# Altium PCB DA2_VERR2_PCB.PcbDoc (part 1 of 2)
Units mm, origin at the board's own origin, x right, y up, seen from the top; angles counter-clockwise.
Board outline 80.01 x 48.77 mm, 2 copper layers (Top Layer, Bottom Layer); 62 components, 71 nets, 290 pads, 92 vias.
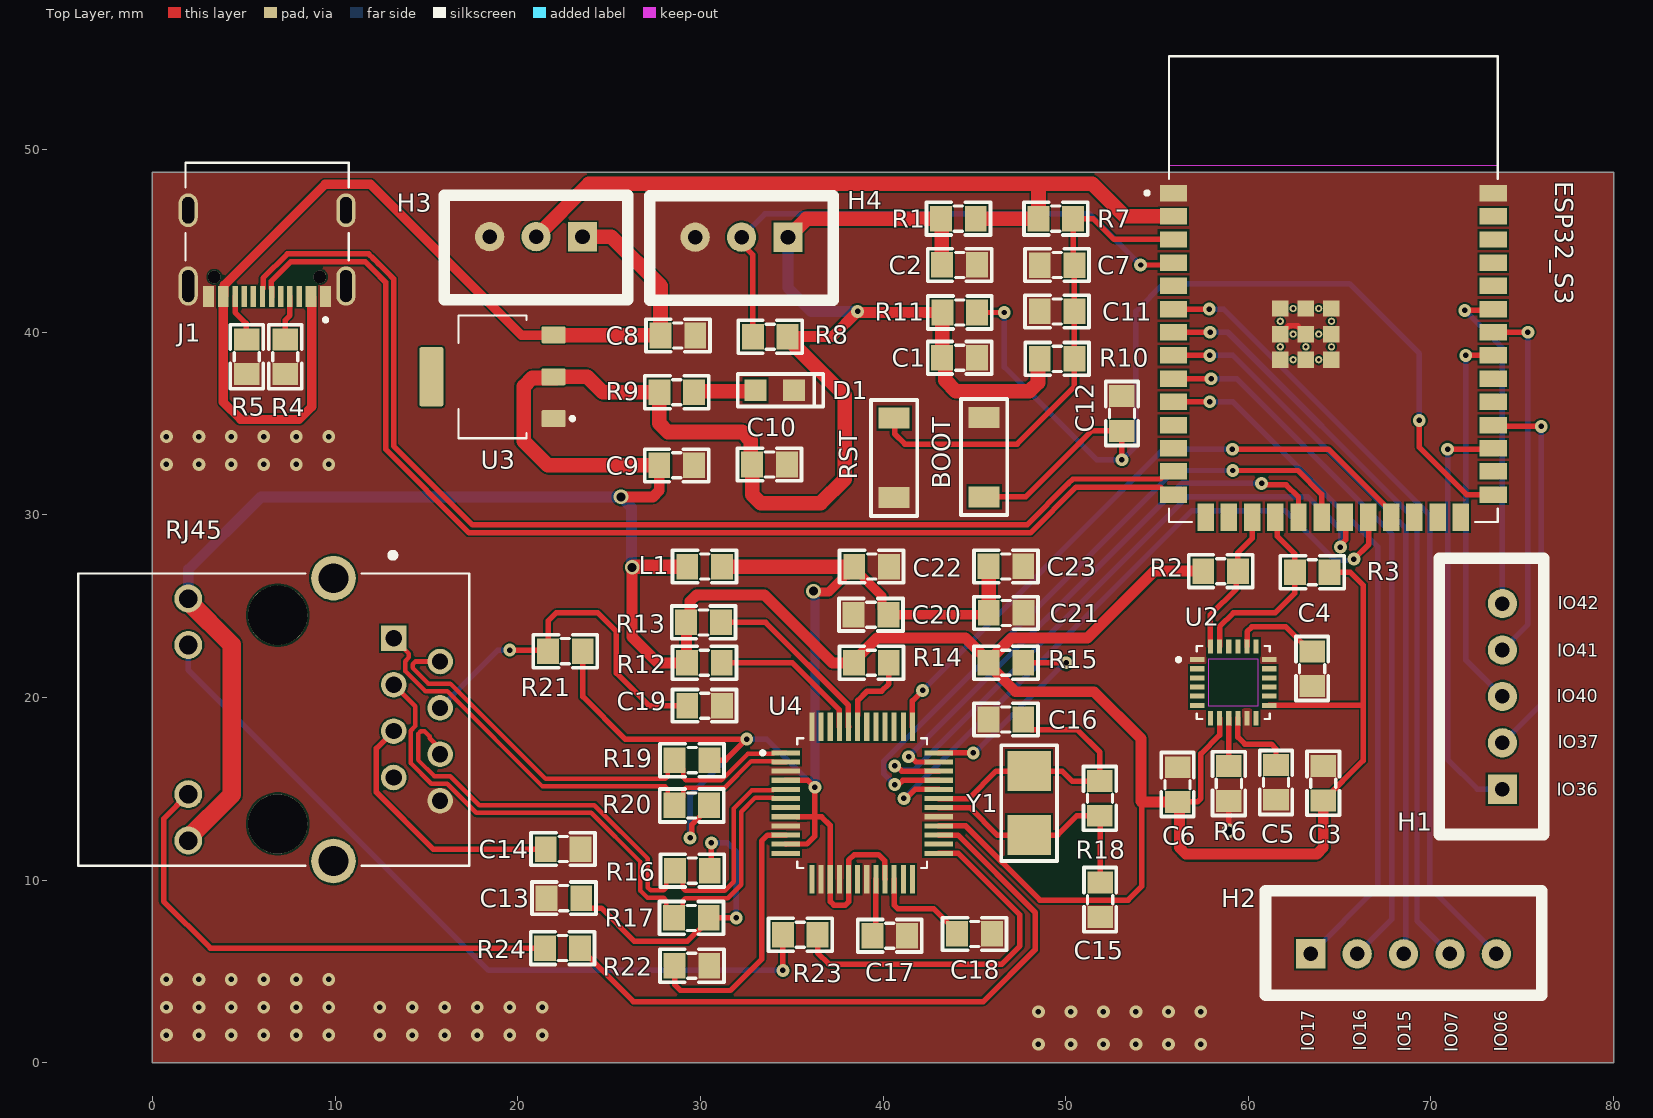
[diagram p0: Top Layer view]
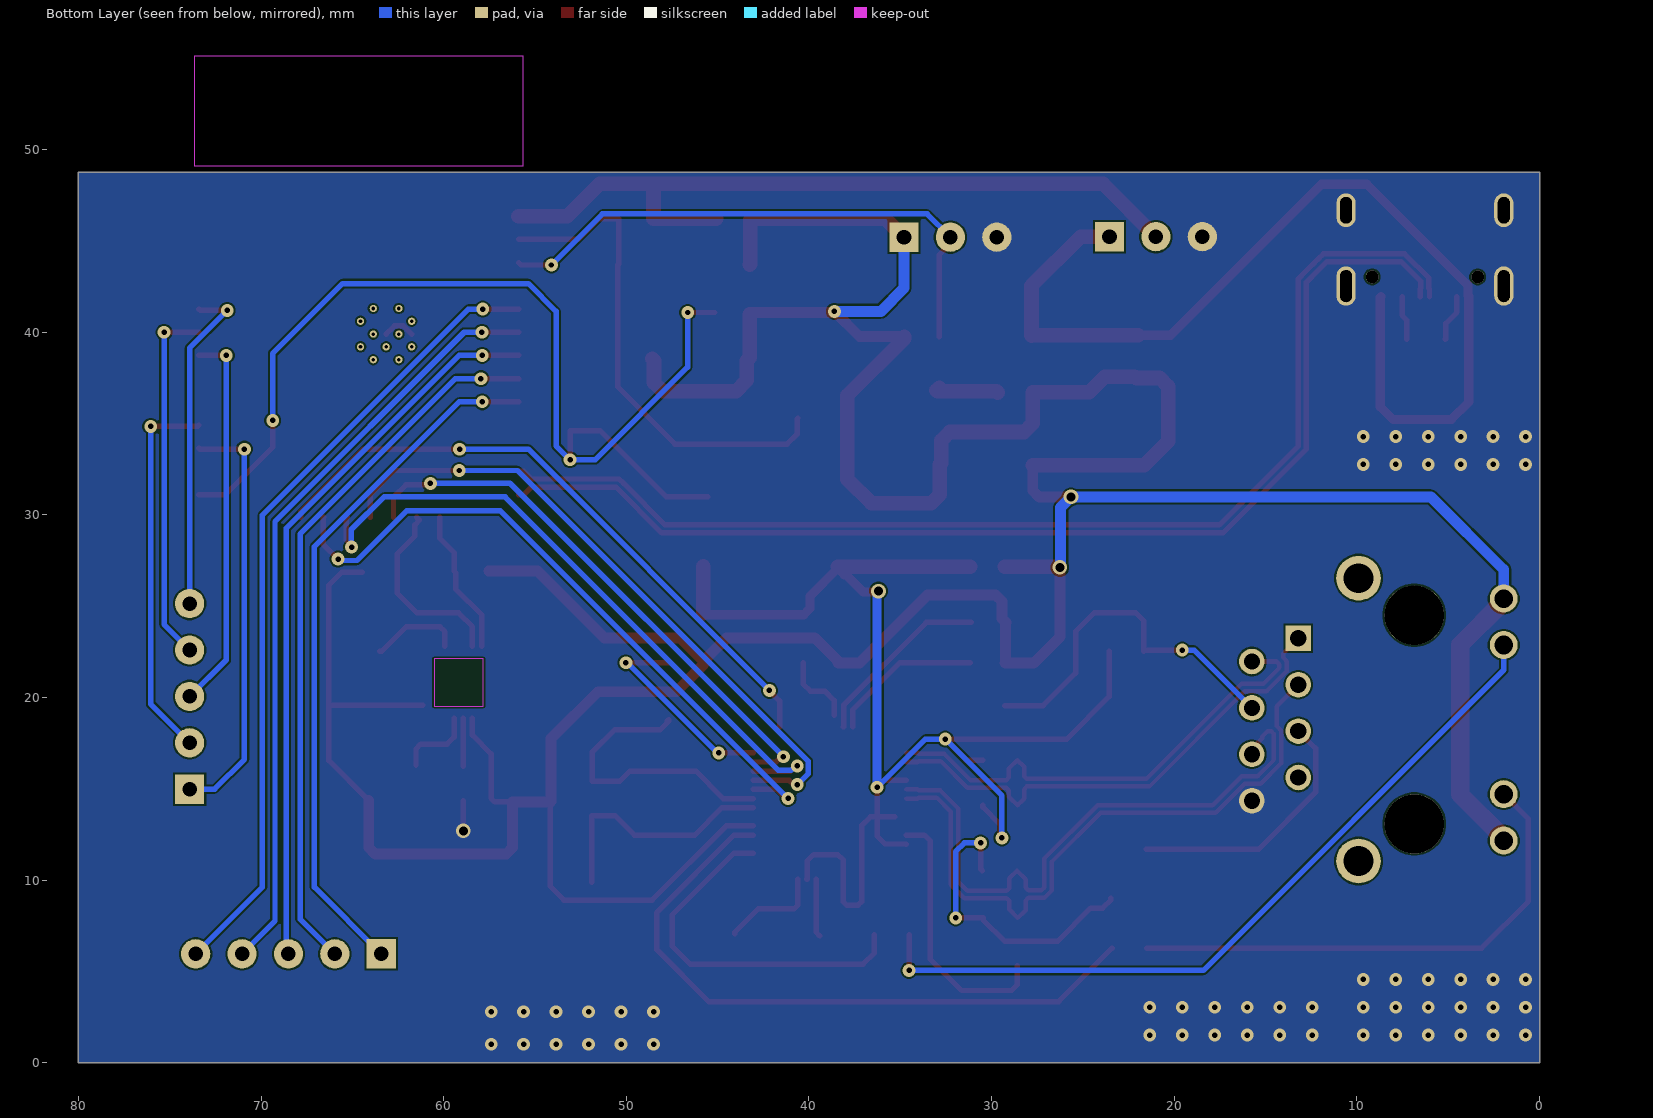
[diagram p1: Bottom Layer view, seen from below]
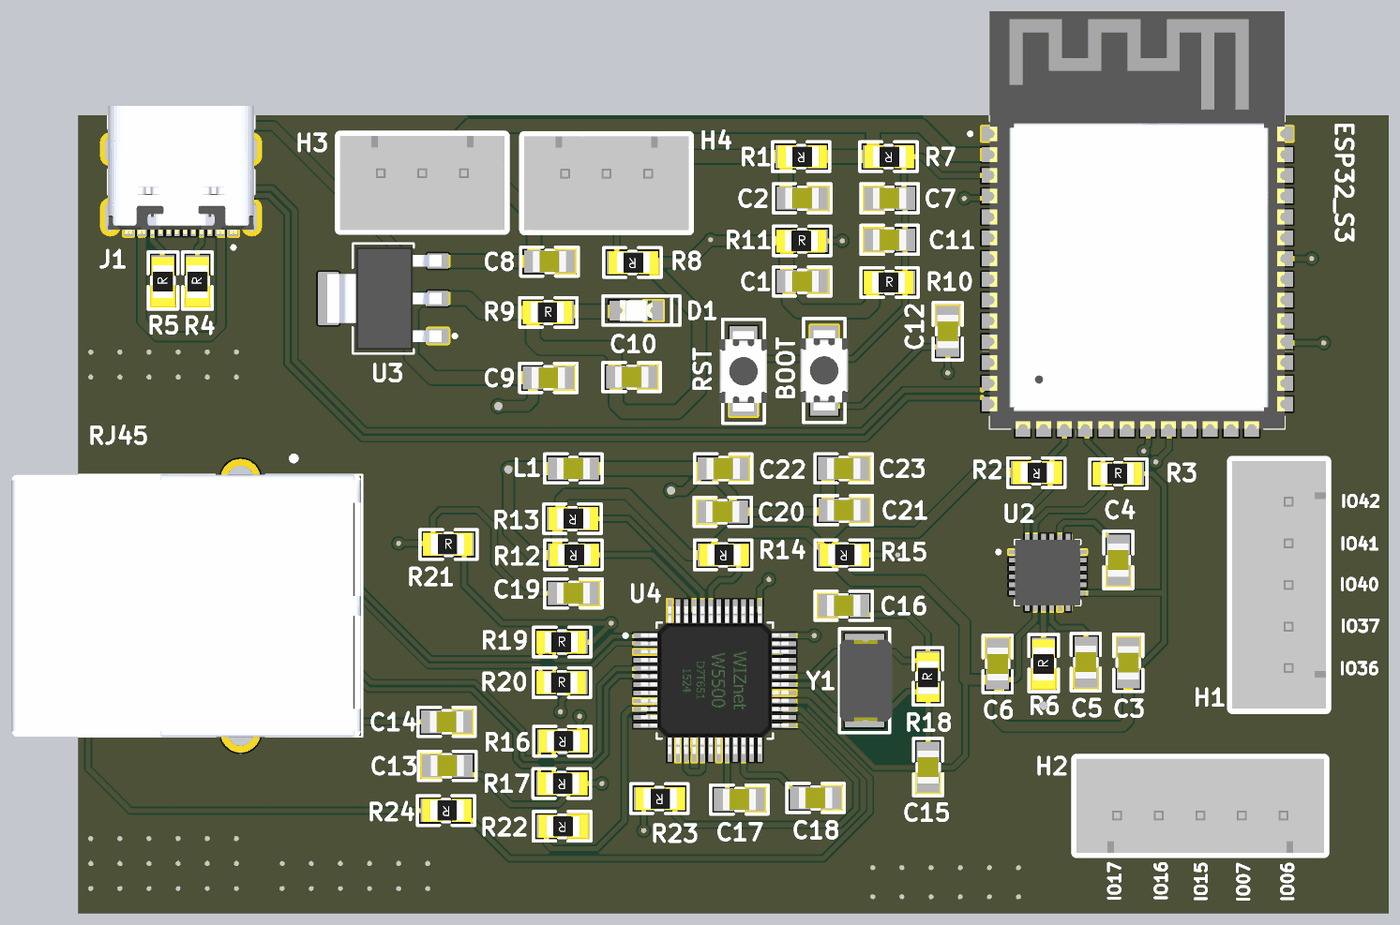
[diagram p2: 3D render of the assembled board from above, using the file's embedded part models]

## Layer stack, top to bottom
Top Solder: solder mask 0.0102, Solder Resist, Dk 3.5
Top Layer: signal copper 0.0356
Dielectric 1: dielectric 0.32, FR-4, Dk 4.8
Bottom Layer: signal copper 0.0356
Bottom Solder: solder mask 0.0102, Solder Resist, Dk 3.5

## Board outline
0,0 80.01,0 80.01,48.768 0,48.768

## Design rules (kind name [scope] priority, off if disabled: settings)
Clearance [All] p1: gap=0.1 ignorepadtopadclearanceinfootprint=FALSE
DiffPairsRouting DiffPairsRouting_diff90 [InDifferentialPair('DATA')] p1: maxlimit=0.14 minlimit=0.14 mostfreqgap=0.14 toplayer_minwidth=0.3 toplayer_maxwidth=0.3 toplayer_prefwidth=0.3 bottomlayer_minwidth=0.3 bottomlayer_maxwidth=0.3 bottomlayer_prefwidth=0.3 impedanceprofiledriven=TRUE impedanceprofileid={6B9BEBF5-C8D8-40E7-A6D3-6E69B729E11B} impedanceprofilevalue=90.000000 maxuncoupledlength=12.7
DiffPairsRouting DiffPairsRouting_diff100 [All] p2: maxlimit=0.161 minlimit=0.161 mostfreqgap=0.161 toplayer_minwidth=0.249 toplayer_maxwidth=0.249 toplayer_prefwidth=0.249 bottomlayer_minwidth=0.249 bottomlayer_maxwidth=0.249 bottomlayer_prefwidth=0.249 impedanceprofiledriven=TRUE impedanceprofileid={6716CD85-C355-4CCB-A095-ADE1CE298117} impedanceprofilevalue=100.000000 maxuncoupledlength=12.7
MatchedLengths DiffPair_100MatchedLengths [InDifferentialPairClass('diff100')] p1: tolerance=25.4 checknetsindiffpair=FALSE checkdiffpairvsdiffpair=TRUE checkxsignals=TRUE checkothers=TRUE
MinimumSolderMaskSliver [All] p1: minsoldermaskwidth=0
PlaneConnect [All] p1: planeconnectstyle=Direct reliefexpansion=0.508 reliefentries=4 reliefconductorwidth=0.254 reliefairgap=0.254
PolygonConnect [All] p1: connectstyle=Direct reliefconductorwidth=0.254 reliefentries=4 polygonreliefangle="90 Angle" airgapwidth=0.254
RoutingVias [All] p1: holewidth=0.3 width=0.7 viastyle="Through Hole" minholewidth=0.3 minwidth=0.7 maxholewidth=1 maxwidth=1
SilkToSilkClearance [All] p1: silktosilkclearance=0
SilkToSolderMaskClearance [IsPad] p1: minsilkscreentomaskgap=0 clearancetoexposedcopper=TRUE
SolderMaskExpansion [All] p1: expansion=0.102 istentingtop=FALSE
SupplyNets "Schematic Supply Nets_4" [InNet('VCC_5V')] p1: voltage=0.000
SupplyNets "Schematic Supply Nets_3" [InNet('GND')] p2: voltage=0.000
SupplyNets "Schematic Supply Nets_2" [InNet('ESP_3V3')] p3: voltage=0.000
SupplyNets "Schematic Supply Nets_1" [InNet('VCC_3V3')] p4: voltage=0.000
SupplyNets "Schematic Supply Nets" [InNet('VCC_PHYA(3V3)')] p5: voltage=0.000
Width [All] p1: maxlimit=5 minlimit=0.15 preferedwidth=0.3
25 further rules are at their usual default settings.

## Classes and differential pairs
differential pair class diff100: ETH_RX ETH_TX
differential pair class diff90: DATA
component class DA2_SCH_PAGE2: C13 C14 C15 C16 C17 C18 C19 C20 C21 C22 C23 L1 R12 R13 R14 R15 R16 R17 R18 R20 R21 R22 R23 R24 RJ45 U4 Y1
component class DA2_SCH_PAGE1: BOOT C1 C2 C3 C4 C5 C6 C7 C8 C9 C10 C11 C12 D1 ESP32_S3 H1 H2 H3 H4 J1 R1 R2 R3 R4 R5 R6 R7 R8 R9 R10 R11 RST U2 U3
differential pair ETH_TX: +ETH_TX_P -ETH_TX_N
differential pair ETH_RX: +ETH_RX_P -ETH_RX_N
differential pair DATA: +DATA_P -DATA_N

## Components (designator, comment, footprint, x,y, rotation, side; value= is the part's Value field where it differs from the comment)
BOOT "TACTILE SWITCH" "SWITCH SMD" 45.542,33.172 r90 top (schematic designator SW2)
C1 "0.1uF" "Tu 0805" 44.196,38.608 r180 top value=100nF
C2 "10uF" "Tu 0805" 44.196,43.688 r180 top value=10µF
C3 "10nF" "tu 0805" 64.11,15.316 r270 top
C4 "2.2nF" "tu 0805" 63.5,21.59 r270 top
C5 "0.1uF" "Tu 0805" 61.515,15.352 r90 top value=100nF
C6 "0.1uF" "Tu 0805" 56.134,15.24 r270 top value=100nF
C7 "1uF" "Tu 0805" 49.53,43.688 r0 top value=1µF
C8 "10uF" "Tu 0805" 28.772,39.824 r180 top value=10µF
C9 "10uF" "Tu 0805" 28.702,32.715 r180 top value=10µF
C10 "100nF" "tu 0805" 33.782,32.766 r0 top
C11 "100nF" "tu 0805" 49.53,41.148 r0 top
C12 "100nF" "tu 0805" 53.086,35.56 r270 top
C13 "100nF" "tu 0805" 22.53,9.017 r180 top
C14 "10nF" "tu 0805" 22.479,11.709 r0 top
C15 "20pF" "tu 0805" 51.892,8.941 r270 top
C16 "20pF" "tu 0805" 46.736,18.796 r180 top
C17 "4.7uF" "Tu 0805" 40.361,6.96 r0 top
C18 "10nF" "tu 0805" 45.009,7.061 r0 top
C19 "22nF" "tu 0805" 30.226,19.558 r0 top
C20 "100nF" "tu 0805" 39.345,24.536 r180 top
C21 "100nF" "tu 0805" 46.736,24.638 r0 top
C22 "100nF" "tu 0805" 39.37,27.178 r0 top
C23 "10uF" "Tu 0805" 46.736,27.178 r180 top value=10µF
D1 "LED_RED" "LED 0805" 34.07,36.83 r180 top
ESP32_S3 "ESP32-S3-WROOM-1-N8R2" XCVR_ESP32-S3-WROOM-1-N8R2 64.656,42.365 r0 top (schematic designator U1)
H1 "Header 5P 2.54" XH2.54M-5 73.914,14.986 r90 top
H2 "Header 5P 2.54" XH2.54M-5 63.424,5.969 r0 top
H3 "Header 3P 2.54" XH2.54M-3 23.546,45.237 r180 top
H4 "Header 3P 2.54" XH2.54M-3 34.798,45.212 r180 top
J1 "KH-TYPE-C-16P" KINGHELM_KH-TYPE-C-16P 6.274,46.685 r180 top locked
L1 "1uH" "Tu 0805" 30.226,27.178 r0 top
R1 "0 Ohm" "Tro SMD 0805" 44.134,46.167 r180 top value=0Ω
R2 "4.7k" "tro smd 0805" 58.49,26.863 r180 top
R3 "4.7k" "tro smd 0805" 63.5,26.924 r0 top
R4 "5.1K" "tro smd 0805" 7.214,38.659 r90 top
R5 "5.1K" "tro smd 0805" 5.105,38.659 r90 top
R6 "4.7k" "tro smd 0805" 58.877,15.291 r90 top
R7 "10k" "Tro SMD 0805" 49.468,46.167 r180 top value=10kΩ
R8 "4.7k" "tro smd 0805" 33.833,39.7 r180 top
R9 "1k" "Tro SMD 0805" 28.702,36.779 r0 top value=1kΩ
R10 "10k" "Tro SMD 0805" 49.53,38.608 r0 top value=10kΩ
R11 "10k" "Tro SMD 0805" 44.196,41.148 r0 top value=10kΩ
R12 "10k" "Tro SMD 0805" 30.226,21.844 r180 top value=10kΩ
R13 "10k" "Tro SMD 0805" 30.175,24.054 r180 top value=10kΩ
R14 "10k" "Tro SMD 0805" 39.37,21.844 r180 top value=10kΩ
R15 "10k" "Tro SMD 0805" 46.736,21.844 r180 top value=10kΩ
R16 "51" "tro smd 0805" 29.566,10.465 r180 top
R17 "51" "tro smd 0805" 29.515,7.874 r180 top
R18 "1M" "tro smd 0805" 51.816,14.478 r90 top
R19 "51" "tro smd 0805" 29.54,16.637 r0 top
R20 "51" "tro smd 0805" 29.526,14.158 r0 top
R21 "10" "tro smd 0805" 22.606,22.606 r0 top
R22 "12.4k" "tro smd 0805" 29.54,5.258 r180 top
R23 "1k" "Tro SMD 0805" 35.478,6.95 r180 top value=1kΩ
R24 "1k" "Tro SMD 0805" 22.454,6.223 r180 top value=1kΩ
RJ45 "HR911105A" HANRUN_HR911105A 6.858,18.796 r90 top (schematic designator J2)
RST "TACTILE SWITCH" "SWITCH SMD" 40.615,33.122 r270 top (schematic designator SW1)
U2 "MPU-6050" QFN50P400X400X95-24N 59.182,20.828 r0 top
U3 "AMS1117-3.3" SOT229P700X180-4N 18.618,37.567 r90 top
U4 "W5500" QFP50P900X900X160-48N 38.862,14.224 r0 top
Y1 "25Mhz" "XTAL 25.000MHz" 48.006,14.224 r90 top value=4Mhz

## Footprints (in the part's own frame and the unit in brackets; to place one, negate y for a bottom-side part, rotate by r counter-clockwise, add the part's x,y. Pads: shape width x height; smd on the part's side, far side on the other; paste and mask are expansions set on the pad)
HANRUN_HR911105A [mm]
  rect 1.398x1.398 / inner round 1.398 / far side rect 1.398x1.398 hole 0.89: 1(4.45,-6.35)
  round 1.398 hole 0.89: 2(3.18,-8.89) 3(1.91,-6.35) 4(0.64,-8.89) 5(-0.63,-6.35) 6(-1.9,-8.89) 7(-3.17,-6.35) 8(-4.44,-8.89)
  round 1.53 hole 1.02: 9(6.625,4.9) 10(4.085,4.9) 11(-4.085,4.9) 12(-6.625,4.9)
  round 2.445 hole 1.63: 15(7.745,-3.05) 16(-7.745,-3.05)
  round 3.25 hole 3.25 unplated: ""(-5.715,0) ""(5.715,0)
  silkscreen extent -8,-10.48 9.15,10.92, body extent -8.02,-10.38 8.02,10.92, height 13.5
KINGHELM_KH-TYPE-C-16P [mm]
  rect 0.6x1.15 smd: A1_B12(-3.2,4.725) A4_B9(-2.4,4.725) A9_B4(2.4,4.725) A12_B1(3.2,4.725)
  rect 0.3x1.15 smd: A5(-1.25,4.725) A6(-0.25,4.725) A7(0.25,4.725) A8(1.25,4.725) B5(1.75,4.725) B6(0.75,4.725) B7(-0.75,4.725) B8(-1.75,4.725)
  oval 1.05x1.85 hole 0.65 slot 1.45 at 90 deg: SH1(-4.32,0) SH2(4.32,0)
  oval 1.05x2.15 hole 0.65 slot 1.75 at 90 deg: SH3(-4.32,4.15) SH4(4.32,4.15)
  round 0.7 hole 0.7 unplated: ""(-2.89,3.65) ""(2.89,3.65)
  silkscreen extent -4.47,-2.6 4.47,6.1, body extent -4.47,-2.64 4.47,5.18, height 3.41
"LED 0805" [mm]
  rect 1.2x1.2 smd: 1(-1.05,0) 2(1.05,0)
  silkscreen extent -2.67,-0.89 2.03,0.89, body extent -1,-0.63 1,0.63, height 0.8
QFN50P400X400X95-24N [mm]
  rect 0.79x0.28 smd: 1(-1.97,1.25) 2(-1.97,0.75) 3(-1.97,0.25) 4(-1.97,-0.25) 5(-1.97,-0.75) 6(-1.97,-1.25) 13(1.97,-1.25) 14(1.97,-0.75) 15(1.97,-0.25) 16(1.97,0.25) 17(1.97,0.75) 18(1.97,1.25)
  rect 0.28x0.79 smd: 7(-1.25,-1.97) 8(-0.75,-1.97) 9(-0.25,-1.97) 10(0.25,-1.97) 11(0.75,-1.97) 12(1.25,-1.97) 19(1.25,1.97) 20(0.75,1.97) 21(0.25,1.97) 22(-0.25,1.97) 23(-0.75,1.97) 24(-1.25,1.97)
  Keep-Out Layer region: 1.35,-1.3 -1.35,-1.3 -1.35,1.3 1.35,1.3
  silkscreen extent -3.1,-2 2,2, body extent -2,-2 2,2, height 0.93
QFP50P900X900X160-48N [mm]
  rect 1.56x0.28 smd: 1(-4.18,2.75) 2(-4.18,2.25) 3(-4.18,1.75) 4(-4.18,1.25) 5(-4.18,0.75) 6(-4.18,0.25) 7(-4.18,-0.25) 8(-4.18,-0.75) 9(-4.18,-1.25) 10(-4.18,-1.75) 11(-4.18,-2.25) 12(-4.18,-2.75) 25(4.18,-2.75) 26(4.18,-2.25) 27(4.18,-1.75) 28(4.18,-1.25) 29(4.18,-0.75) 30(4.18,-0.25) 31(4.18,0.25) 32(4.18,0.75) 33(4.18,1.25) 34(4.18,1.75) 35(4.18,2.25) 36(4.18,2.75)
  rect 0.28x1.56 smd: 13(-2.75,-4.18) 14(-2.25,-4.18) 15(-1.75,-4.18) 16(-1.25,-4.18) 17(-0.75,-4.18) 18(-0.25,-4.18) 19(0.25,-4.18) 20(0.75,-4.18) 21(1.25,-4.18) 22(1.75,-4.18) 23(2.25,-4.18) 24(2.75,-4.18) 37(2.75,4.18) 38(2.25,4.18) 39(1.75,4.18) 40(1.25,4.18) 41(0.75,4.18) 42(0.25,4.18) 43(-0.25,4.18) 44(-0.75,4.18) 45(-1.25,4.18) 46(-1.75,4.18) 47(-2.25,4.18) 48(-2.75,4.18)
  silkscreen extent -5.55,-3.55 3.55,3.55, body extent -4.5,-4.47 4.5,4.53, height 1.6
SOT229P700X180-4N [mm]
  rrect15% 0.93x1.31 smd: 1(-2.29,-3.345) 2(0,-3.345) 3(2.29,-3.345)
  rrect15% 3.24x1.31 smd: 4(0,3.345)
  silkscreen extent -3.36,-4.47 3.36,1.86, body extent -3.15,-3.57 3.15,3.43, height 1.8
"SWITCH SMD" [mm]
  rect 1.15x1.7 smd: 1(-2.175,0) 2(2.175,0)
  silkscreen extent -3.17,-1.27 3.17,1.27, body extent -2.45,-1.45 2.45,1.45, height 2
"Tro SMD 0805" [mm]
  rect 1.2x1.4 smd: 1(-0.946,-0.061) 2(0.954,-0.061)
  silkscreen extent -1.75,-0.97 1.75,0.84, body extent -1.56,-0.76 1.44,0.64, height 0.53
"tro smd 0805" [mm]
  rect 1.2x1.4 smd: 1(-0.946,-0.061) 2(0.954,-0.061)
  silkscreen extent -1.75,-0.97 1.75,0.84, body extent -1.56,-0.76 1.44,0.64, height 0.53
"Tu 0805" [mm] "Compoment SMD 80x50mil"
  rect 1.2x1.4 smd: 1(-0.946,-0.003) 2(0.954,-0.003)
  silkscreen extent -1.75,-0.89 1.75,0.89, body extent -1.01,-0.64 1.01,0.63, height 0.61
"tu 0805" [mm] "Compoment SMD 80x50mil"
  rect 1.2x1.4 smd: 1(-0.946,-0.003) 2(0.954,-0.003)
  silkscreen extent -1.75,-0.89 1.75,0.89, body extent -1.01,-0.64 1.01,0.63, height 0.61
XCVR_ESP32-S3-WROOM-1-N8R2 [mm]
  rect 1.5x0.9 smd: 1(-8.75,5.26) 2(-8.75,3.99) 3(-8.75,2.72) 4(-8.75,1.45) 5(-8.75,0.18) 6(-8.75,-1.09) 7(-8.75,-2.36) 8(-8.75,-3.63) 9(-8.75,-4.9) 10(-8.75,-6.17) 11(-8.75,-7.44) 12(-8.75,-8.71) 13(-8.75,-9.98) 14(-8.75,-11.25) 27(8.75,-11.25) 28(8.75,-9.98) 29(8.75,-8.71) 30(8.75,-7.44) 31(8.75,-6.17) 32(8.75,-4.9) 33(8.75,-3.63) 34(8.75,-2.36) 35(8.75,-1.09) 36(8.75,0.18) 37(8.75,1.45) 38(8.75,2.72) 39(8.75,3.99) 40(8.75,5.26)
  rect 0.9x1.5 smd: 15(-6.985,-12.5) 16(-5.715,-12.5) 17(-4.445,-12.5) 18(-3.175,-12.5) 19(-1.905,-12.5) 20(-0.635,-12.5) 21(0.635,-12.5) 22(1.905,-12.5) 23(3.175,-12.5) 24(4.445,-12.5) 25(5.715,-12.5) 26(6.985,-12.5)
  rect 0.9x0.9 smd: 41_1(-1.5,-2.46) 41_2(-2.9,-2.46) 41_3(-0.1,-2.46) 41_4(-2.9,-3.86) 41_5(-1.5,-3.86) 41_6(-0.1,-3.86) 41_7(-2.9,-1.06) 41_8(-1.5,-1.06) 41_9(-0.1,-1.06)
  round 0.4 hole 0.2 mask+0: 41_11(-2.9,-1.76) 41_12(-0.1,-1.76) 41_13(-2.9,-3.16) 41_14(-1.5,-3.16) 41_15(-0.1,-3.16) 41_16(-2.2,-1.06) 41_17(-0.8,-1.06) 41_18(-2.2,-2.46) 41_19(-0.8,-2.46) 41_20(-2.2,-3.86) 41_21(-0.8,-3.86)
  Keep-Out Layer region: 9,6.75 -9,6.75 -9,12.75 9,12.75
  Keep-Out Layer region: 9,6.75 -9,6.75 -9,12.75 9,12.75
  silkscreen extent -10.3,-12.75 9,12.75, body extent -9,-12.75 9,12.75, height 3.25
XH2.54M-3 [mm]
  rect 1.6x1.6 hole 0.8: 1(0,0)
  round 1.6 hole 0.8: 2(2.54,0) 3(5.08,0)
  silkscreen extent -2.48,-2.26 7.56,3.46, body extent -2.48,-2.26 7.56,3.48, height 6.91
XH2.54M-5 [mm]
  rect 1.6x1.6 hole 0.8: 1(0,0)
  round 1.6 hole 0.8: 2(2.54,0) 3(5.08,0) 4(7.62,0) 5(10.16,0)
  silkscreen extent -2.48,-2.26 12.64,3.46, body extent -2.48,-2.26 12.64,3.48, height 6.91
"XTAL 25.000MHz" [mm]
  rect 2.2x2.4 smd: 1(-1.75,0) 2(1.75,0)
  silkscreen extent -3.17,-1.52 3.17,1.52, body extent -2.5,-1.68 2.5,1.52, height 1.35

## Part data
BOOT RST: library part SW1_RS-282G05A3-SMRT-SMD, "Tactile Switch SPST-NO Top Actuated Surface Mount", Alternate Part Number-1=NA, Case/Package=SMD, Manufacturer="ITT C&K", Manufacturer Part Number=RS-282G05A3-SMRT, Supplier Part Number-1=RS-282G05A3-SMRT, Supplier-1="SP ROAD"
C1 C5 C6: library part "Tu 0.1uF", "Dán 0805", Dielectric Material=Ceramic, LCSC Part Number=C7229230, Manufacturer="Samsung Electro-Mechanics", Manufacturer Part Number=CL05B104KB5NNWC, Max Operating Temperature=125°C, Min Operating Temperature=-55°C, Supplier Part Number=1276-CL05B104KB5NNWCCT-ND, Voltage Rating (DC)=50V, Category="Ceramic Capacitors", China RoHS=Compliant, ComponentLink1Description=https://datasheet.octopart.com:443/CL05B104KB5NNWC-Samsung-Electro-Mechanics-datasheet-182018729.pdf?src-supplier=IHS, ComponentLink1URL=https://datasheet.octopart.com:443/CL05B104KB5NNWC-Samsung-Electro-Mechanics-datasheet-182018729.pdf?src-supplier=IHS, Lifecycle Status=Production, Mounting Technology="Surface Mount", Number of Terminals=2, Pricing="1=0.1, 10=0.054, 50=0.037, 100=0.0319, 500=0.02338, 1000=0.02075, 2500=0.018, 5000=0.01634 (USD)", REACH SVHC=Yes, RoHS=Compliant, Schedule B="8532240020, 8532240020|8532240020|8532240020|8532240020|8532240020", Stock=89504, Supplier=DigiKey
C2 C8 C9 C23: library part "Tu 10uF", "Dán 0805", Case Code (Imperial)=0402, Case Code (Metric)=1005, Dielectric=X5R, Dielectric Material=Ceramic, LCSC Part Number=C315248, Manufacturer="Samsung Electro-Mechanics", Manufacturer Part Number=CL05A106MP5NUNC, Max Operating Temperature=85°C, Min Operating Temperature=-55°C, Supplier Part Number=1276-1450-1-ND, Tolerance=20%, Voltage Rating=10V, Case/Package=0402, Category="Ceramic Capacitors", China RoHS=Compliant, ComponentLink1Description=https://datasheet.octopart.com:443/CL05A106MP5NUNC-Samsung-Electro-Mechanics-datasheet-182018593.pdf?src-supplier=IHS, ComponentLink1URL=https://datasheet.octopart.com:443/CL05A106MP5NUNC-Samsung-Electro-Mechanics-datasheet-182018593.pdf?src-supplier=IHS, ComponentLink2Description=https://datasheet.octopart.com:443/CL05A106MP5NUNC-Samsung-Electro-Mechanics-datasheet-136031723.pdf?src-supplier=Upverter, ComponentLink2URL=https://datasheet.octopart.com:443/CL05A106MP5NUNC-Samsung-Electro-Mechanics-datasheet-136031723.pdf?src-supplier=Upverter, ComponentLink3Description=https://datasheet.octopart.com:443/CL05A106MP5NUNC-Samsung-Electro-Mechanics-datasheet-110226206.pdf?src-supplier=Future+Electronics, ComponentLink3URL=https://datasheet.octopart.com:443/CL05A106MP5NUNC-Samsung-Electro-Mechanics-datasheet-110226206.pdf?src-supplier=Future+Electronics, ComponentLink4Description=https://datasheet.octopart.com:443/CL05A106MP5NUNC-Samsung-Electro-Mechanics-datasheet-87580039.pdf?src-supplier=Future+Electronics, ComponentLink4URL=https://datasheet.octopart.com:443/CL05A106MP5NUNC-Samsung-Electro-Mechanics-datasheet-87580039.pdf?src-supplier=Future+Electronics, ComponentLink5Description=https://datasheet.octopart.com:443/CL05A106MP5NUNC-Samsung-Electro-Mechanics-datasheet-81461595.pdf?src-supplier=Future+Electronics, ComponentLink5URL=https://datasheet.octopart.com:443/CL05A106MP5NUNC-Samsung-Electro-Mechanics-datasheet-81461595.pdf?src-supplier=Future+Electronics, ComponentLink6Description=https://datasheet.octopart.com:443/CL05A106MP5NUNC-Samsung-datasheet-42280527.pdf?src-supplier=Future+Electronics, ComponentLink6URL=https://datasheet.octopart.com:443/CL05A106MP5NUNC-Samsung-datasheet-42280527.pdf?src-supplier=Future+Electronics, ComponentLink7Description=https://datasheet.octopart.com:443/CL05A106MP5NUNC-Samsung-datasheet-34153002.pdf?src-supplier=Future+Electronics, ComponentLink7URL=https://datasheet.octopart.com:443/CL05A106MP5NUNC-Samsung-datasheet-34153002.pdf?src-supplier=Future+Electronics, ComponentLink8Description=https://datasheet.octopart.com:443/CL05A106MP5NUNC-Samsung-datasheet-25077983.pdf?src-supplier=Future+Electronics, ComponentLink8URL=https://datasheet.octopart.com:443/CL05A106MP5NUNC-Samsung-datasheet-25077983.pdf?src-supplier=Future+Electronics, ComponentLink9Description=https://datasheet.octopart.com:443/CL05A106MP5NUNC-Samsung-Electro-Mechanics-datasheet-149136670.pdf?src-supplier=Future+Electronics, ComponentLink9URL=https://datasheet.octopart.com:443/CL05A106MP5NUNC-Samsung-Electro-Mechanics-datasheet-149136670.pdf?src-supplier=Future+Electronics, ComponentLink10Description=https://datasheet.octopart.com:443/CL05A106MP5NUNC-Samsung-datasheet-8326407.pdf?src-supplier=TME, ComponentLink10URL=https://datasheet.octopart.com:443/CL05A106MP5NUNC-Samsung-datasheet-8326407.pdf?src-supplier=TME, Contact Plating=Tin, Depth=500µm, Height=700µm, Lead Free="Lead Free", Length=1mm, Lifecycle Status=NRND, Material=Ceramic, Mounting Technology="Surface Mount", Number of Terminals=2, Packaging="Tape and Reel", Pricing="1=0.08, 10=0.038, 50=0.034, 100=0.0296, 500=0.0272, 1000=0.02, 2500=0.01844 (USD)", Radiation Hardening=No, REACH SVHC=Yes, RoHS=Compliant, Schedule B="8532240020, 8532240020|8532240020|8532240020|8532240020|8532240020|8532240020|8532240020|8532240020|8532240020|8532240020|8532240020|8532240020|8532240020|8532240020|8532240020|8532240020|8532240020|8532240020|8532240020|8532240020|8532240020|8532240020|8532240020|85", Stock=2239957, Supplier=DigiKey, Termination=Wraparound, Thickness=711.2µm, Voltage Rating (DC)=10V, Width=500µm
C3 C14 C18: library part "Tu 10nF", "Dán 0805", Chung_Loai=Dán, Don_Vi=Con, Ma_Hang=MH007857, So_Chan=2, Ten_Linh_Kien="Tụ 0805 22nF 50V 20%"
C4: library part "Tu 2.2nF", "Dán 0805", Chung_Loai=Dán, Don_Vi=Con, Ma_Hang=MH007857, So_Chan=2, Ten_Linh_Kien="Tụ 0805 22nF 50V 20%"
C7: library part "Tu 1uF", "Dán 0805", Case Code (Imperial)=0402, Case Code (Metric)=1005, Dielectric=X5R, Dielectric Material=Ceramic, LCSC Part Number=C361059, Manufacturer=Murata, Manufacturer Lifecycle Status="IN PRODUCTION", Manufacturer Part Number=GRM155R6YA105KE11D, Max Operating Temperature=85°C, Min Operating Temperature=-55°C, Supplier Part Number=490-10019-1-ND, Tolerance=10%, Voltage Rating=35V, Case/Package=0402, Category="Ceramic Capacitors", ComponentLink1Description=https://datasheet.octopart.com:443/GRM155R6YA105KE11D-Murata-datasheet-149523044.pdf?src-supplier=Newark, ComponentLink1URL=https://datasheet.octopart.com:443/GRM155R6YA105KE11D-Murata-datasheet-149523044.pdf?src-supplier=Newark, ComponentLink2Description=https://datasheet.octopart.com:443/GRM155R6YA105KE11D-Murata-datasheet-165579666.pdf?src-supplier=TME, ComponentLink2URL=https://datasheet.octopart.com:443/GRM155R6YA105KE11D-Murata-datasheet-165579666.pdf?src-supplier=TME, ComponentLink3Description=https://datasheet.octopart.com:443/GRM155R6YA105KE11D-Murata-datasheet-141266224.pdf?src-supplier=Ciiva, ComponentLink3URL=https://datasheet.octopart.com:443/GRM155R6YA105KE11D-Murata-datasheet-141266224.pdf?src-supplier=Ciiva, ComponentLink4Description=https://datasheet.octopart.com:443/GRM155R6YA105KE11D-Murata-datasheet-140690670.pdf?src-supplier=Ciiva, ComponentLink4URL=https://datasheet.octopart.com:443/GRM155R6YA105KE11D-Murata-datasheet-140690670.pdf?src-supplier=Ciiva, ComponentLink5Description=https://datasheet.octopart.com:443/GRM155R6YA105KE11D-Murata-datasheet-138740836.pdf?src-supplier=Ciiva, ComponentLink5URL=https://datasheet.octopart.com:443/GRM155R6YA105KE11D-Murata-datasheet-138740836.pdf?src-supplier=Ciiva, ComponentLink6Description=https://datasheet.octopart.com:443/GRM155R6YA105KE11D-Murata-datasheet-22122223.pdf?src-supplier=Future+Electronics, ComponentLink6URL=https://datasheet.octopart.com:443/GRM155R6YA105KE11D-Murata-datasheet-22122223.pdf?src-supplier=Future+Electronics, ComponentLink7Description=https://datasheet.octopart.com/GRM155R6YA105KE11D-Murata-datasheet-12515295.pdf, ComponentLink7URL=https://datasheet.octopart.com/GRM155R6YA105KE11D-Murata-datasheet-12515295.pdf, ComponentLink8Description=https://datasheet.octopart.com/GRM155R6YA105KE11D-Murata-datasheet-12510076.pdf, ComponentLink8URL=https://datasheet.octopart.com/GRM155R6YA105KE11D-Murata-datasheet-12510076.pdf, ComponentLink9Description=https://datasheet.octopart.com/GRM155R6YA105KE11D-Murata-datasheet-11978611.pdf, ComponentLink9URL=https://datasheet.octopart.com/GRM155R6YA105KE11D-Murata-datasheet-11978611.pdf, ComponentLink10Description=https://datasheet.octopart.com/GRM155R6YA105KE11D-Murata-datasheet-10025737.pdf, ComponentLink10URL=https://datasheet.octopart.com/GRM155R6YA105KE11D-Murata-datasheet-10025737.pdf, ComponentLink11Description=https://datasheet.octopart.com/GRM155R6YA105KE11D-Murata-datasheet-8819587.pdf, ComponentLink11URL=https://datasheet.octopart.com/GRM155R6YA105KE11D-Murata-datasheet-8819587.pdf, ComponentLink12Description=https://datasheet.octopart.com/GRM155R6YA105KE11D-Murata-datasheet-38882776.pdf, ComponentLink12URL=https://datasheet.octopart.com/GRM155R6YA105KE11D-Murata-datasheet-38882776.pdf, ComponentLink13Description=http://sigma.octopart.com:80/reach_statement/Murata-company-16.pdf?src-supplier=Compliance+Statements, ComponentLink13URL=http://sigma.octopart.com:80/reach_statement/Murata-company-16.pdf?src-supplier=Compliance+Statements, Height=500µm, Length=1mm, Lifecycle Status=Production, Material=Ceramic, Mounting Technology="Surface Mount", Number of Terminals=2, Packaging="Tape & Reel (TR)", Pricing="1=0.1, 10=0.048, 50=0.033, 100=0.0284, 500=0.01904, 1000=0.01691, 2500=0.01582, 5000=0.01432 (USD)", REACH SVHC=Yes, RoHS=Compliant, Schedule B="8532240020, 8532240020|8532240020, 8532240020|8532240020|8532240020, 8532240020|8532240020|8532240020|8532240020", Stock=212803, Supplier=DigiKey, Thickness=500µm, Voltage Rating (DC)=35V, Width=500µm
C10 C11 C12 C13 C20 C21 C22: library part "Tu 100nF", "Dán 0805", Chung_Loai=Dán, Don_Vi=Con, Ma_Hang=MH007857, So_Chan=2, Ten_Linh_Kien="Tụ 0805 22nF 50V 20%"
C15 C16: library part "Tu  20pF", "Dán 0805", Chung_Loai=Dán, Don_Vi=Con, Ma_Hang=MH004558, So_Chan=2, Ten_Linh_Kien="Tụ 0805 20P 10% 50V"
C17: library part "Tu 4.7uF", "Dán 0805", Chung_Loai=Dán, Don_Vi=Con, Ma_Hang=MH008100, So_Chan=2, Ten_Linh_Kien="Tụ 0805 200p 10% 50V"
C19: library part "Tu 22nF", "Dán 0805", Chung_Loai=Dán, Don_Vi=Con, Ma_Hang=MH004558, So_Chan=2, Ten_Linh_Kien="Tụ 0805 20P 10% 50V"
D1: library part VLMS1500-GS08, "LED RED 0402 SMD", Case Code (Imperial)=0402, Case Code (Metric)=1005, Color=Red, Forward Current=30mA, Forward Voltage=2.4V, LCSC Part Number=C511370, Manufacturer=Vishay, Max Operating Temperature=85°C, Min Operating Temperature=-30°C, Power Rating=75mW, Reverse Voltage=5V, Supplier Part Number=VLMS1500-GS08DKR-ND, Test Current=20mA, Case/Package=0402, Category=LEDs, ComponentLink1Description=https://datasheet.octopart.com:443/VLMS1500-GS08-Vishay-datasheet-181477802.pdf?src-supplier=IHS, ComponentLink1URL=https://datasheet.octopart.com:443/VLMS1500-GS08-Vishay-datasheet-181477802.pdf?src-supplier=IHS, ComponentLink2Description=https://datasheet.octopart.com:443/VLMS1500-GS08-Vishay-datasheet-21227148.pdf?src-supplier=Future+Electronics, ComponentLink2URL=https://datasheet.octopart.com:443/VLMS1500-GS08-Vishay-datasheet-21227148.pdf?src-supplier=Future+Electronics, ComponentLink3Description=https://datasheet.octopart.com:443/VLMS1500-GS08-Vishay-datasheet-102762782.pdf?src-supplier=Future+Electronics, ComponentLink3URL=https://datasheet.octopart.com:443/VLMS1500-GS08-Vishay-datasheet-102762782.pdf?src-supplier=Future+Electronics, ComponentLink4Description=https://datasheet.octopart.com:443/VLMS1500-GS08-Vishay-datasheet-33014519.pdf?src-supplier=element14+APAC, ComponentLink4URL=https://datasheet.octopart.com:443/VLMS1500-GS08-Vishay-datasheet-33014519.pdf?src-supplier=element14+APAC, ComponentLink5Description=https://datasheet.octopart.com:443/VLMS1500-GS08-Vishay-datasheet-68326145.pdf?src-supplier=TME, ComponentLink5URL=https://datasheet.octopart.com:443/VLMS1500-GS08-Vishay-datasheet-68326145.pdf?src-supplier=TME, ComponentLink6Description=https://datasheet.octopart.com:443/VLMS1500-GS08-Vishay-Siliconix-datasheet-62309867.pdf?src-supplier=RS+(Formerly+Allied+Electronics), ComponentLink6URL=https://datasheet.octopart.com:443/VLMS1500-GS08-Vishay-Siliconix-datasheet-62309867.pdf?src-supplier=RS+(Formerly+Allied+Electronics), ComponentLink7Description=https://datasheet.octopart.com:443/VLMS1500-GS08-Vishay-datasheet-62332426.pdf?src-supplier=Newark, ComponentLink7URL=https://datasheet.octopart.com:443/VLMS1500-GS08-Vishay-datasheet-62332426.pdf?src-supplier=Newark, ComponentLink8Description=https://datasheet.octopart.com/VLMS1500-GS08-Vishay-datasheet-16093911.pdf, ComponentLink8URL=https://datasheet.octopart.com/VLMS1500-GS08-Vishay-datasheet-16093911.pdf, ComponentLink9Description=http://sigma.octopart.com:80/rohs_statement/Vishay-company-15.pdf?src-supplier=Compliance+Statements, ComponentLink9URL=http://sigma.octopart.com:80/rohs_statement/Vishay-company-15.pdf?src-supplier=Compliance+Statements, Dominant Wavelength=631nm, Height=350µm, Illumination Color=Red, Lead Free="Lead Free", Length=1mm, Lens Style="Rectangular, Square", Lifecycle Status=Production, Luminous Intensity=18mcd, Manufacturer Part Number=VLMS1500-GS08, Mounting Technology="Surface Mount", Number of Circuits=1, Number of LEDs=1, Number of Terminals=2, Packaging="Cut Tape", Peak Wavelength=631nm, Pins=2, Pricing="1=0.24, 10=0.164, 100=0.1147, 500=0.09218, 1000=0.0847 (USD)", Radiation Hardening=No, REACH SVHC=Yes, RoHS=Compliant, Schedule B="8541402000, 8541402000|8541402000|8541402000|8541402000|8541402000", Shape=Rectangular, Supplier=DigiKey, Terminal Pitch=675µm, Viewing Angle=130°, Wavelength=631nm, Width=500µm
ESP32_S3: "WiFi 802.11a/b/g/n, Bluetooth v5.0 Transceiver Module 2.4GHz Antenna Not Included -", Package="- Espressif Systems", Availability="In Stock", Check_prices=https://www.snapeda.com/parts/ESP32-S3-WROOM-1-N8R2/Espressif+Systems/view-part/?ref=eda, MF="Espressif Systems", MP=ESP32-S3-WROOM-1-N8R2, Price=None, Purchase-URL=https://pricing.snapeda.com/search?q=ESP32-S3-WROOM-1-N8R2&ref=eda, SnapEDA_Link=https://www.snapeda.com/parts/ESP32-S3-WROOM-1-N8R2/Espressif+Systems/view-part/?ref=snap
H1 H2: library part "Header 5P 2.54 Duc Thang", "Cắm", Chung_Loai=Cắm, Don_Vi=Con, Ma_Hang=MH001298, Ten_Linh_Kien="Header 5P XH2.54-5P Đực Thẳng"
H3 H4: library part "Header 3P 2.54 Duc Thang", "Cắm", Chung_Loai=Cắm, Don_Vi=Con, Ma_Hang=MH001292, Ten_Linh_Kien="Header 3P XH2.54-3P Đực Thẳng"
J1: Package=None, Check_prices=https://www.snapeda.com/parts/KH-TYPE-C-16P/Kinghelm/view-part/?ref=eda, MF=kinghelm, MP=KH-TYPE-C-16P, SnapEDA_Link=https://www.snapeda.com/parts/KH-TYPE-C-16P/Kinghelm/view-part/?ref=snap
L1: library part "Cuon Cam 1uH", "Dán 0805"
R1: library part "Tro 0Ohm", "Dán 0805", Case Code (Imperial)=0402, LCSC Part Number=C60485, Manufacturer="Yageo Group", Manufacturer Part Number=RC0402JR-070RL, Max Operating Temperature=155°C, Max Power Dissipation=63mW, Min Operating Temperature=-55°C, Power Dissipation=62.5mW, Supplier Part Number=311-0.0JRCT-ND, Temperature Coefficient=200ppm/°C, Tolerance=5%, Voltage Rating=50V, Case/Package=0402, Category="Chip SMD Resistors", China RoHS=Non-Compliant, ComponentLink1Description=https://datasheet.octopart.com:443/RC0402JR-070RL-Yageo-datasheet-182189538.pdf?src-supplier=IHS, ComponentLink1URL=https://datasheet.octopart.com:443/RC0402JR-070RL-Yageo-datasheet-182189538.pdf?src-supplier=IHS, ComponentLink2Description=https://datasheet.octopart.com:443/RC0402JR-070RL-Yageo-datasheet-10408619.pdf?src-supplier=Newark, ComponentLink2URL=https://datasheet.octopart.com:443/RC0402JR-070RL-Yageo-datasheet-10408619.pdf?src-supplier=Newark, ComponentLink3Description=https://datasheet.octopart.com:443/RC0402JR-070RL-Yageo-datasheet-12531192.pdf?src-supplier=Seeed+Studio, ComponentLink3URL=https://datasheet.octopart.com:443/RC0402JR-070RL-Yageo-datasheet-12531192.pdf?src-supplier=Seeed+Studio, ComponentLink4Description=https://datasheet.octopart.com:443/RC0402JR-070RL-Yageo-datasheet-8324527.pdf?src-supplier=TME, ComponentLink4URL=https://datasheet.octopart.com:443/RC0402JR-070RL-Yageo-datasheet-8324527.pdf?src-supplier=TME, ComponentLink5Description=https://datasheet.octopart.com:443/RC0402JR-070RL-Yageo-datasheet-62067350.pdf?src-supplier=Farnell, ComponentLink5URL=https://datasheet.octopart.com:443/RC0402JR-070RL-Yageo-datasheet-62067350.pdf?src-supplier=Farnell, ComponentLink6Description=https://datasheet.octopart.com:443/RC0402JR-070RL-Yageo-datasheet-8329306.pdf?src-supplier=element14, ComponentLink6URL=https://datasheet.octopart.com:443/RC0402JR-070RL-Yageo-datasheet-8329306.pdf?src-supplier=element14, ComponentLink7Description=https://datasheet.octopart.com:443/RC0402JR-070RL-Yageo-datasheet-505231.pdf?src-supplier=element14, ComponentLink7URL=https://datasheet.octopart.com:443/RC0402JR-070RL-Yageo-datasheet-505231.pdf?src-supplier=element14, ComponentLink8Description=https://datasheet.octopart.com:443/RC0402JR-070RL-Yageo-datasheet-175423674.pdf?src-supplier=SOS+electronic, ComponentLink8URL=https://datasheet.octopart.com:443/RC0402JR-070RL-Yageo-datasheet-175423674.pdf?src-supplier=SOS+electronic, ComponentLink9Description=https://datasheet.octopart.com:443/RC0402JR-070RL-Yageo-datasheet-164759695.pdf?src-supplier=Future+Electronics, ComponentLink9URL=https://datasheet.octopart.com:443/RC0402JR-070RL-Yageo-datasheet-164759695.pdf?src-supplier=Future+Electronics, ComponentLink10Description=https://datasheet.octopart.com:443/RC0402JR-070RL-Yageo-datasheet-137700087.pdf?src-supplier=Future+Electronics, ComponentLink10URL=https://datasheet.octopart.com:443/RC0402JR-070RL-Yageo-datasheet-137700087.pdf?src-supplier=Future+Electronics, ComponentLink11Description=https://datasheet.octopart.com/RC0402JR-070RL-Yageo-datasheet-73766026.pdf, ComponentLink11URL=https://datasheet.octopart.com/RC0402JR-070RL-Yageo-datasheet-73766026.pdf, ComponentLink12Description=http://sigma.octopart.com:80/rohs_statement/Yageo-company-2.pdf?src-supplier=Compliance+Statements, ComponentLink12URL=http://sigma.octopart.com:80/rohs_statement/Yageo-company-2.pdf?src-supplier=Compliance+Statements, ComponentLink13Description=http://sigma.octopart.com:80/conflict_mineral_statement/Yageo-company-3.pdf?src-supplier=Compliance+Statements, ComponentLink13URL=http://sigma.octopart.com:80/conflict_mineral_statement/Yageo-company-3.pdf?src-supplier=Compliance+Statements, Composition="Thick Film", Contact Plating=Tin, Depth=500µm, Features="Moisture Resistant", Height=350µm, Lead Free="Lead Free", Length=1mm, Lifecycle Status=Production, Military Standard=Not, Mounting Technology="Surface Mount", Number of Terminals=2, Number of Terminations=2, Packaging="Tape & Reel", Pins=2, Power Rating=63mW, Pricing="1=0.1, 10=0.010, 25=0.0064, 50=0.0054, 100=0.0047, 250=0.00392, 500=0.00346, 1000=0.00304, 5000=0.0023, 10000=0.00206, 20000=0.00185, 30000=0.00175, 50000=0.00163, 70000=0.00155, 100000=0.00148, 120000=0.00145, 240000=0.00134, 250000=0.00133 (USD)", Radiation Hardening=No, REACH SVHC=Yes, RoHS=Compliant, Schedule B="8533290000, 8533290000|8533290000, 8533290000|8533290000|8533290000, 8533290000|8533290000|8533290000|8533290000", Stock=23498418, Supplier=DigiKey, Termination=SMD/SMT, Voltage Rating (DC)=50V, Width=500µm
R2 R3 R6 R8: library part "Tro 4.7k", "Dán 0805", Chung_Loai=Dán, Don_Vi=Con, Ma_Hang=MH005307, So_Chan=2, Ten_Linh_Kien="Trở 0805 5% 4.7k"
R4 R5: library part "Tro 5.1K", "Dán 0805", Chung_Loai=Dán, Don_Vi=Con, Ma_Hang=MH005480, So_Chan=2, Ten_Linh_Kien="Trở 0805 1% 49.9R"
R7 R10 R11 R12 R13 R14 R15: library part "Tro 10k", "Dán 0805", Case Code (Imperial)=0402, LCSC Part Number=C60490, Manufacturer="Yageo Group", Manufacturer Part Number=RC0402FR-0710KL, Max Operating Temperature=155°C, Min Operating Temperature=-55°C, Power Dissipation=62.5mW, Power Rating=63mW, Supplier Part Number=311-10.0KLRCT-ND, Temperature Coefficient=100ppm/°C, Tolerance=1%, Voltage Rating=50V, Case Code (Metric)=0402, Case/Package=0402, Category="Chip SMD Resistors", China RoHS=Non-Compliant, ComponentLink1Description=https://datasheet.octopart.com:443/RC0402FR-0710KL-Yageo-datasheet-175887523.pdf?src-supplier=Newark, ComponentLink1URL=https://datasheet.octopart.com:443/RC0402FR-0710KL-Yageo-datasheet-175887523.pdf?src-supplier=Newark, ComponentLink2Description=https://datasheet.octopart.com:443/RC0402FR-0710KL-Yageo-datasheet-12531192.pdf?src-supplier=Newark, ComponentLink2URL=https://datasheet.octopart.com:443/RC0402FR-0710KL-Yageo-datasheet-12531192.pdf?src-supplier=Newark, ComponentLink3Description=https://datasheet.octopart.com:443/RC0402FR-0710KL-Yageo-datasheet-8324527.pdf?src-supplier=Newark, ComponentLink3URL=https://datasheet.octopart.com:443/RC0402FR-0710KL-Yageo-datasheet-8324527.pdf?src-supplier=Newark, ComponentLink4Description=https://datasheet.octopart.com:443/RC0402FR-0710KL-Yageo-datasheet-10408619.pdf?src-supplier=element14+APAC, ComponentLink4URL=https://datasheet.octopart.com:443/RC0402FR-0710KL-Yageo-datasheet-10408619.pdf?src-supplier=element14+APAC, ComponentLink5Description=https://datasheet.octopart.com:443/RC0402FR-0710KL-Yageo-datasheet-62067350.pdf?src-supplier=element14+APAC, ComponentLink5URL=https://datasheet.octopart.com:443/RC0402FR-0710KL-Yageo-datasheet-62067350.pdf?src-supplier=element14+APAC, ComponentLink6Description=https://datasheet.octopart.com:443/RC0402FR-0710KL-Yageo-datasheet-21426659.pdf?src-supplier=element14+APAC, ComponentLink6URL=https://datasheet.octopart.com:443/RC0402FR-0710KL-Yageo-datasheet-21426659.pdf?src-supplier=element14+APAC, ComponentLink7Description=https://datasheet.octopart.com:443/RC0402FR-0710KL-Yageo-datasheet-164759695.pdf?src-supplier=Upverter, ComponentLink7URL=https://datasheet.octopart.com:443/RC0402FR-0710KL-Yageo-datasheet-164759695.pdf?src-supplier=Upverter, ComponentLink8Description=https://datasheet.octopart.com:443/RC0402FR-0710KL-Yageo-datasheet-103092701.pdf?src-supplier=Upverter, ComponentLink8URL=https://datasheet.octopart.com:443/RC0402FR-0710KL-Yageo-datasheet-103092701.pdf?src-supplier=Upverter, ComponentLink9Description=https://sigma.octopart.com:443/138820526/technical_drawing/Yageo-RC0402FR-0710KL.pdf?src-supplier=Upverter, ComponentLink9URL=https://sigma.octopart.com:443/138820526/technical_drawing/Yageo-RC0402FR-0710KL.pdf?src-supplier=Upverter, ComponentLink10Description=https://datasheet.octopart.com:443/RC0402FR-0710KL-Yageo-datasheet-98239111.pdf?src-supplier=Upverter, ComponentLink10URL=https://datasheet.octopart.com:443/RC0402FR-0710KL-Yageo-datasheet-98239111.pdf?src-supplier=Upverter, ComponentLink11Description=https://datasheet.octopart.com:443/RC0402FR-0710KL-Yageo-datasheet-68298067.pdf?src-supplier=Upverter, ComponentLink11URL=https://datasheet.octopart.com:443/RC0402FR-0710KL-Yageo-datasheet-68298067.pdf?src-supplier=Upverter, ComponentLink12Description=https://datasheet.octopart.com:443/RC0402FR-0710KL-Yageo-datasheet-68297981.pdf?src-supplier=Upverter, ComponentLink12URL=https://datasheet.octopart.com:443/RC0402FR-0710KL-Yageo-datasheet-68297981.pdf?src-supplier=Upverter, ComponentLink13Description=https://datasheet.octopart.com:443/RC0402FR-0710KL-Yageo-datasheet-141435361.pdf?src-supplier=Upverter, ComponentLink13URL=https://datasheet.octopart.com:443/RC0402FR-0710KL-Yageo-datasheet-141435361.pdf?src-supplier=Upverter, ComponentLink14Description=https://datasheet.octopart.com:443/RC0402FR-0710KL-Yageo-datasheet-12509768.pdf?src-supplier=Upverter, ComponentLink14URL=https://datasheet.octopart.com:443/RC0402FR-0710KL-Yageo-datasheet-12509768.pdf?src-supplier=Upverter, ComponentLink15Description=https://datasheet.octopart.com:443/RC0402FR-0710KL-Yageo-datasheet-8329306.pdf?src-supplier=element14, ComponentLink15URL=https://datasheet.octopart.com:443/RC0402FR-0710KL-Yageo-datasheet-8329306.pdf?src-supplier=element14, ComponentLink16Description=https://datasheet.octopart.com:443/RC0402FR-0710KL-Yageo-datasheet-505231.pdf?src-supplier=element14, ComponentLink16URL=https://datasheet.octopart.com:443/RC0402FR-0710KL-Yageo-datasheet-505231.pdf?src-supplier=element14, ComponentLink17Description=https://datasheet.octopart.com:443/RC0402FR-0710KL-Yageo-datasheet-175423674.pdf?src-supplier=SOS+electronic, ComponentLink17URL=https://datasheet.octopart.com:443/RC0402FR-0710KL-Yageo-datasheet-175423674.pdf?src-supplier=SOS+electronic, ComponentLink18Description=https://datasheet.octopart.com:443/RC0402FR-0710KL-Yageo-datasheet-137700087.pdf?src-supplier=Future+Electronics, ComponentLink18URL=https://datasheet.octopart.com:443/RC0402FR-0710KL-Yageo-datasheet-137700087.pdf?src-supplier=Future+Electronics, ComponentLink19Description=https://datasheet.octopart.com:443/RC0402FR-0710KL-Yageo-datasheet-8324255.pdf?src-supplier=Future+Electronics, ComponentLink19URL=https://datasheet.octopart.com:443/RC0402FR-0710KL-Yageo-datasheet-8324255.pdf?src-supplier=Future+Electronics, ComponentLink20Description=https://datasheet.octopart.com:443/RC0402FR-0710KL-Yageo-datasheet-79472498.pdf?src-supplier=Megastar, ComponentLink20URL=https://datasheet.octopart.com:443/RC0402FR-0710KL-Yageo-datasheet-79472498.pdf?src-supplier=Megastar, ComponentLink21Description=https://datasheet.octopart.com/RC0402FR-0710KL-Yageo-datasheet-73766026.pdf, ComponentLink21URL=https://datasheet.octopart.com/RC0402FR-0710KL-Yageo-datasheet-73766026.pdf, ComponentLink22Description=http://sigma.octopart.com:80/rohs_statement/Yageo-company-2.pdf?src-supplier=Compliance+Statements, ComponentLink22URL=http://sigma.octopart.com:80/rohs_statement/Yageo-company-2.pdf?src-supplier=Compliance+Statements, ComponentLink23Description=http://sigma.octopart.com:80/conflict_mineral_statement/Yageo-company-3.pdf?src-supplier=Compliance+Statements, ComponentLink23URL=http://sigma.octopart.com:80/conflict_mineral_statement/Yageo-company-3.pdf?src-supplier=Compliance+Statements, Composition="Thick Film", Depth=500µm, Height=350µm, Lead Free="Lead Free", Lead Pitch=200µm, Length=1mm, Lifecycle Status=Production, Military Standard=Not, Mounting Technology="Surface Mount", Number of Terminals=2, Number of Terminations=2, Packaging="Tape & Reel", Pins=2, Pricing="1=0.11, 10=0.011, 25=0.010, 50=0.0092, 100=0.0071, 250=0.00308, 10000=0.00286, 20000=0.00253, 30000=0.00237, 50000=0.0022, 70000=0.0021, 100000=0.002, 120000=0.00196, 240000=0.00182, 250000=0.00181 (USD)", REACH SVHC=Yes, RoHS=Compliant, Schedule B="8533210045, 8533210045|8533210045|8533210045|8533210045|8533210045|8533210045|8533210045|8533210045|8533210045|8533210045|8533210045|8533210045|8533210045|8533210045, 8533210045|8533210045|8533210045|8533210045|8533210045|8533210045|8533210045|8533210045|8533210045|8533210045|8533210045|8533210045|8533210045|8533210045|8533210045, 8533210045|8533210045|8533210045|8533210045|8533210045|8533210045|8533210045|8533210045|8533210045|8533210045|8533210045|8533210045|8533210045|8533210045|8533210045|8533210045", Stock=10693324, Supplier=DigiKey, Termination=SMD/SMT, Voltage Rating (DC)=50V, Width=500µm, Working Voltage=50V
R9 R23 R24: library part "Tro 1k", "Dán 0805", Case Code (Imperial)=0402, LCSC Part Number=C105637, Manufacturer="Yageo Group", Manufacturer Part Number=RC0402JR-071KL, Max Operating Temperature=155°C, Max Power Dissipation=63mW, Min Operating Temperature=-55°C, Power Dissipation=62.5mW, Supplier Part Number=311-1.0KJRCT-ND, Temperature Coefficient=100ppm/°C, Tolerance=5%, Voltage Rating=50V, Case/Package=0402, Category="Chip SMD Resistors", China RoHS=Non-Compliant, ComponentLink1Description=https://datasheet.octopart.com:443/RC0402JR-071KL-Yageo-datasheet-175887523.pdf?src-supplier=Farnell, ComponentLink1URL=https://datasheet.octopart.com:443/RC0402JR-071KL-Yageo-datasheet-175887523.pdf?src-supplier=Farnell, ComponentLink2Description=https://datasheet.octopart.com:443/RC0402JR-071KL-Yageo-datasheet-8324527.pdf?src-supplier=Farnell, ComponentLink2URL=https://datasheet.octopart.com:443/RC0402JR-071KL-Yageo-datasheet-8324527.pdf?src-supplier=Farnell, ComponentLink3Description=https://datasheet.octopart.com:443/RC0402JR-071KL-Yageo-datasheet-10408619.pdf?src-supplier=Newark, ComponentLink3URL=https://datasheet.octopart.com:443/RC0402JR-071KL-Yageo-datasheet-10408619.pdf?src-supplier=Newark, ComponentLink4Description=https://datasheet.octopart.com:443/RC0402JR-071KL-Yageo-datasheet-505231.pdf?src-supplier=Newark, ComponentLink4URL=https://datasheet.octopart.com:443/RC0402JR-071KL-Yageo-datasheet-505231.pdf?src-supplier=Newark, ComponentLink5Description=https://datasheet.octopart.com:443/RC0402JR-071KL-Yageo-datasheet-79472498.pdf?src-supplier=Upverter, ComponentLink5URL=https://datasheet.octopart.com:443/RC0402JR-071KL-Yageo-datasheet-79472498.pdf?src-supplier=Upverter, ComponentLink6Description=https://datasheet.octopart.com:443/RC0402JR-071KL-Yageo-datasheet-44585784.pdf?src-supplier=Upverter, ComponentLink6URL=https://datasheet.octopart.com:443/RC0402JR-071KL-Yageo-datasheet-44585784.pdf?src-supplier=Upverter, ComponentLink7Description=https://datasheet.octopart.com:443/RC0402JR-071KL-Yageo-datasheet-62067350.pdf?src-supplier=element14+APAC, ComponentLink7URL=https://datasheet.octopart.com:443/RC0402JR-071KL-Yageo-datasheet-62067350.pdf?src-supplier=element14+APAC, ComponentLink8Description=https://datasheet.octopart.com:443/RC0402JR-071KL-Yageo-datasheet-148775077.pdf?src-supplier=JRH+Electronics, ComponentLink8URL=https://datasheet.octopart.com:443/RC0402JR-071KL-Yageo-datasheet-148775077.pdf?src-supplier=JRH+Electronics, ComponentLink9Description=https://datasheet.octopart.com:443/RC0402JR-071KL-Yageo-datasheet-12531192.pdf?src-supplier=Seeed+Studio, ComponentLink9URL=https://datasheet.octopart.com:443/RC0402JR-071KL-Yageo-datasheet-12531192.pdf?src-supplier=Seeed+Studio, ComponentLink10Description=https://datasheet.octopart.com:443/RC0402JR-071KL-Yageo-datasheet-164759695.pdf?src-supplier=Future+Electronics, ComponentLink10URL=https://datasheet.octopart.com:443/RC0402JR-071KL-Yageo-datasheet-164759695.pdf?src-supplier=Future+Electronics, ComponentLink11Description=https://datasheet.octopart.com:443/RC0402JR-071KL-Yageo-datasheet-137700087.pdf?src-supplier=Future+Electronics, ComponentLink11URL=https://datasheet.octopart.com:443/RC0402JR-071KL-Yageo-datasheet-137700087.pdf?src-supplier=Future+Electronics, ComponentLink12Description=https://datasheet.octopart.com/RC0402JR-071KL-Yageo-datasheet-73766026.pdf, ComponentLink12URL=https://datasheet.octopart.com/RC0402JR-071KL-Yageo-datasheet-73766026.pdf, ComponentLink13Description=https://datasheet.octopart.com:443/RC0402JR-071KL-Yageo-datasheet-8329306.pdf?src-supplier=element14, ComponentLink13URL=https://datasheet.octopart.com:443/RC0402JR-071KL-Yageo-datasheet-8329306.pdf?src-supplier=element14, ComponentLink14Description=http://sigma.octopart.com:80/rohs_statement/Yageo-company-2.pdf?src-supplier=Compliance+Statements, ComponentLink14URL=http://sigma.octopart.com:80/rohs_statement/Yageo-company-2.pdf?src-supplier=Compliance+Statements, ComponentLink15Description=http://sigma.octopart.com:80/conflict_mineral_statement/Yageo-company-3.pdf?src-supplier=Compliance+Statements, ComponentLink15URL=http://sigma.octopart.com:80/conflict_mineral_statement/Yageo-company-3.pdf?src-supplier=Compliance+Statements, Composition="Thick Film", Depth=500µm, Features="Moisture Resistant", Height=350µm, Lead Free="Lead Free", Length=1mm, Lifecycle Status=Production, Military Standard=Not, Mounting Technology="Surface Mount", Number of Terminals=2, Number of Terminations=2, Packaging="Tape & Reel", Pins=2, Power Rating=62.5mW, Pricing="1=0.1, 10=0.006, 25=0.0052, 50=0.004, 100=0.0036, 250=0.00284 (USD)", REACH SVHC=Yes, RoHS=Compliant, Schedule B="8533210045, 8533210045|8533210045, 8533210045|8533210045|8533210045, 8533210045|8533210045|8533210045|8533210045", Stock=6533264, Supplier=DigiKey, Termination=SMD/SMT, Voltage Rating (AC)=50V, Voltage Rating (DC)=50V, Width=500µm, Working Voltage=50V
R16 R17 R19 R20: library part "Tro 51", "Dán 0805", Chung_Loai=Dán, Don_Vi=Con, Ma_Hang=MH005480, So_Chan=2, Ten_Linh_Kien="Trở 0805 1% 49.9R"
R18: library part "Tro 1M", "Dán 0805", Chung_Loai=Dán, Don_Vi=Con, Ma_Hang=MH005480, So_Chan=2, Ten_Linh_Kien="Trở 0805 1% 49.9R"
R21: library part "Tro 10", "Dán 0805", Chung_Loai=Dán, Don_Vi=Con, Ma_Hang=MH005480, So_Chan=2, Ten_Linh_Kien="Trở 0805 1% 49.9R"
R22: library part "Tro 12.4k", "Dán 0805", Chung_Loai=Dán, Don_Vi=Con, Ma_Hang=MH005480, So_Chan=2, Ten_Linh_Kien="Trở 0805 1% 49.9R"
RJ45: "DIP RJ45 Connector;", Package=None, Availability="Not in stock", Check_prices=https://www.snapeda.com/parts/HR911105A/HanRun/view-part/?ref=eda, MF=hanrun, MP=HR911105A, Price=None, SnapEDA_Link=https://www.snapeda.com/parts/HR911105A/HanRun/view-part/?ref=snap
U2: "MPU-6050 series Accelerometer, Gyroscope, 3 Axis Sensor Evaluation Board", Package="QFN-24 InvenSense", Check_prices=https://www.snapeda.com/parts/MPU-6050/TDK+InvenSense/view-part/?ref=eda, MF="TDK InvenSense", MP=MPU-6050, SnapEDA_Link=https://www.snapeda.com/parts/MPU-6050/TDK+InvenSense/view-part/?ref=snap
U3: "Linear Voltage Regulator IC Positive Fixed 1 Output 1A SOT-223-3L", Package="SOT-223-3L UMW", Check_prices=https://www.snapeda.com/parts/AMS1117-3.3/UMW/view-part/?ref=eda, MF=UMW, MP=AMS1117-3.3, SnapEDA_Link=https://www.snapeda.com/parts/AMS1117-3.3/UMW/view-part/?ref=snap
U4: "Hardwired TCP/IP embedded Ethernet controller", Package=None, Availability=Unavailable, MP=W5500, Price=None
Y1: library part "Thach Anh 2 chan SMD 5032", "Crystal For all Crystal 2pin."

## Via types
v1: diameter 0.7, hole 0.3, Top Layer to Bottom Layer, tented both sides, 88 vias
v2: diameter 0.8, hole 0.5, Top Layer to Bottom Layer, tented both sides, 4 vias

## Nets (pads, with @x,y where several pads share a name; then routed paths per layer and width w, separated by ;. In a path a pad name is that pad's centre, name@x,y a point inside that pad or via, vN(x,y) a via of type N, cw(c..) or ccw(c..) an arc to the next point about the centre after c; other vN are vias at no path point)
ACTLED: R24.1 U4.27 | length 36.4
  Top Layer w0.3: R24.1 26.33,3.353 45.491,3.353 48.336,6.198 48.336,8.23 44.102,12.464 43.052,12.464 U4.27
AD0: R6.2 U2.9 | length 2.6
  Top Layer w0.3: U2.9 58.932,16.251 R6.2
CHIP_PU: C7.2 C11.2 ESP32_S3.3 R7.1 R10.2 RST.1 | length 27.4
  Top Layer w0.3: RST.1 40.635,35.276 40.635,34.447 41.199,33.884 47.346,33.884 50.484,37.022 R10.2 C11.2 C7.2 50.414,43.755 R7.1 51.511,46.228 52.654,45.085 ESP32_S3.3
DATA_N: ESP32_S3.13 J1.A7 | length 64.1
  Top Layer w0.3: J1.A7 6.024,42.385 6.054,42.415 6.054,42.967 7.387,44.3 11.834,44.3 12.092,44.042 12.374,43.76 13.079,43.055 13.208,42.926 13.208,33.782 17.526,29.464 47.892,29.464 50.14,31.712 50.398,31.97 55.191,31.97 55.606,32.385 ESP32_S3.13
DATA_P: ESP32_S3.14 J1.A6 | length 63.4
  Top Layer w0.3: J1.A6 6.524,42.385 6.494,42.415 6.494,42.785 7.569,43.86 11.652,43.86 12.063,43.449 12.768,42.744 12.768,33.6 17.344,29.024 48.074,29.024 50.58,31.53 55.191,31.53 55.606,31.115 ESP32_S3.14
ESP_3V3: ESP32_S3.2 H3.2 R1.1 R7.2 | length 42.2
  Top Layer w0.8: H3.2 23.901,48.133 48.514,48.133 ; R1.1 R7.2 48.514,48.133 ; ESP32_S3.2 53.238,46.355 51.46,48.133 48.514,48.133
ETH_RX_N: R16.2 RJ45.6 U4.5 | length 33.6
  Top Layer w0.249: RJ45.6 15.748,17.207 15.176,17.779 15.176,17.873 14.893,18.156 14.687,18.156 14.541,18.01 14.541,16.586 15.438,15.689 16.3,15.689 17.889,14.1 24.198,14.1 27.129,11.17 27.129,9.591 27.274,9.446 27.99,9.446 28.136,9.591 28.136,10.05 R16.2 29.036,10.101 29.036,9.57 29.182,9.425 31.328,9.425 31.823,9.919 31.823,13.927 32.825,14.929 33.997,14.929 34.042,14.974 U4.5
ETH_RX_P: R17.2 RJ45.3 U4.6 | length 35.6
  Top Layer w0.249: RJ45.3 14.397,19.517 14.397,18.445 14.131,18.18 14.131,16.417 15.269,15.279 16.131,15.279 17.719,13.691 24.028,13.691 26.719,11 26.719,9.422 27.105,9.036 27.99,9.036 28.136,8.89 28.136,8.36 R17.2 29.036,8.41 29.036,8.869 29.182,9.015 31.498,9.015 32.233,9.749 32.233,13.757 32.995,14.519 33.997,14.519 34.042,14.474 U4.6
ETH_TX_N: R19.1 RJ45.2 U4.1 | length 26.8
  Top Layer w0.249: RJ45.2 14.396,21.976 14.25,21.83 14.25,21.624 15.105,20.769 16.3,20.769 21.525,15.544 28.077,15.544 28.223,15.69 28.223,16.205 R19.1 29.056,16.115 29.056,15.625 29.201,15.479 29.723,15.479 31.155,15.479 32.605,16.929 33.997,16.929 34.042,16.974 U4.1
ETH_TX_P: R20.1 RJ45.1 U4.2 | length 27.6
  Top Layer w0.249: RJ45.1 14.044,22.41 14.044,22.204 13.84,22 13.84,21.454 14.935,20.359 16.131,20.359 21.355,15.135 28.069,15.135 28.215,14.989 28.215,14.462 R20.1 29.056,14.573 29.056,14.923 29.201,15.069 29.553,15.069 31.325,15.069 32.775,16.519 33.997,16.519 34.042,16.474 U4.2